# Altium PCB PCB.PcbDoc
Units mm, origin at the board's own origin, x right, y up, seen from the top; angles counter-clockwise.
Board outline 57 x 42 mm, 2 copper layers (Top Layer, Bottom Layer); 55 components, 41 nets, 176 pads, 4 vias.
Unrouted connection lines stored in the file: 6.
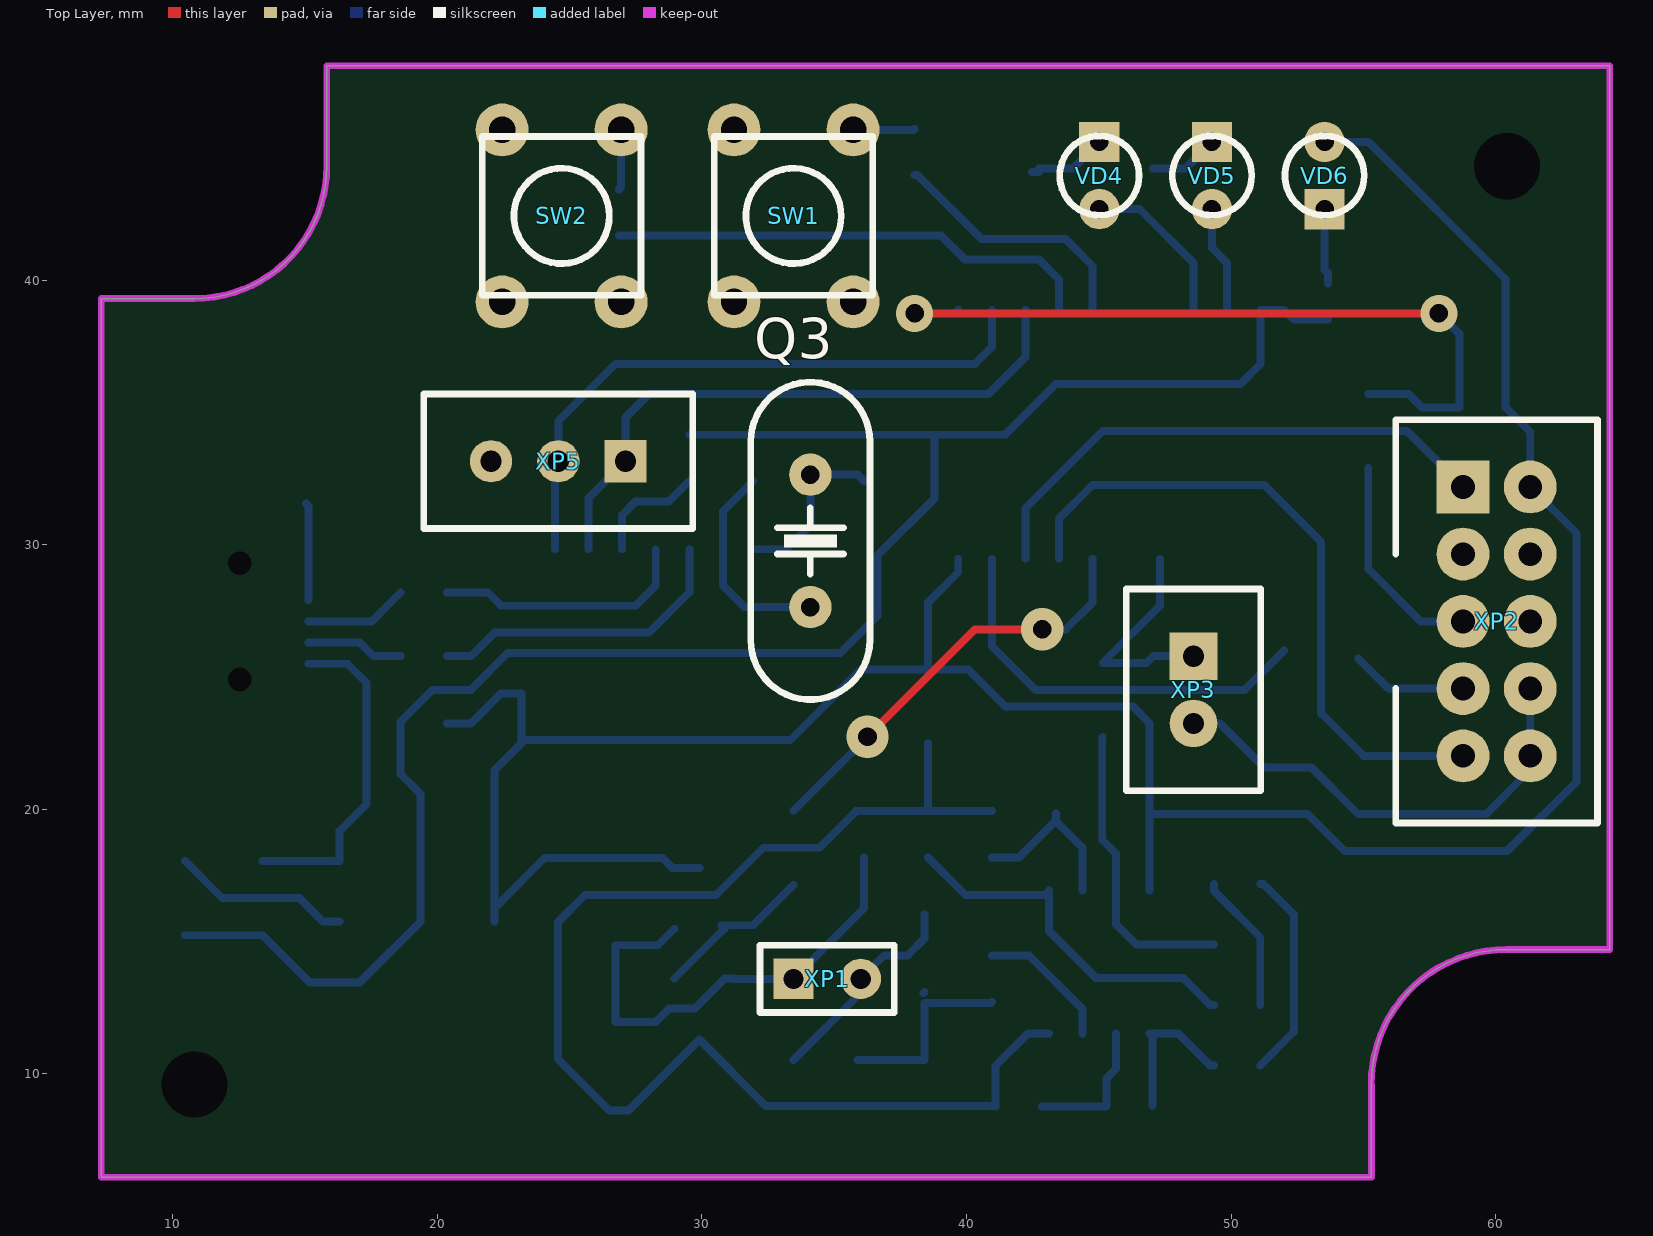
[diagram p0: Top Layer view]
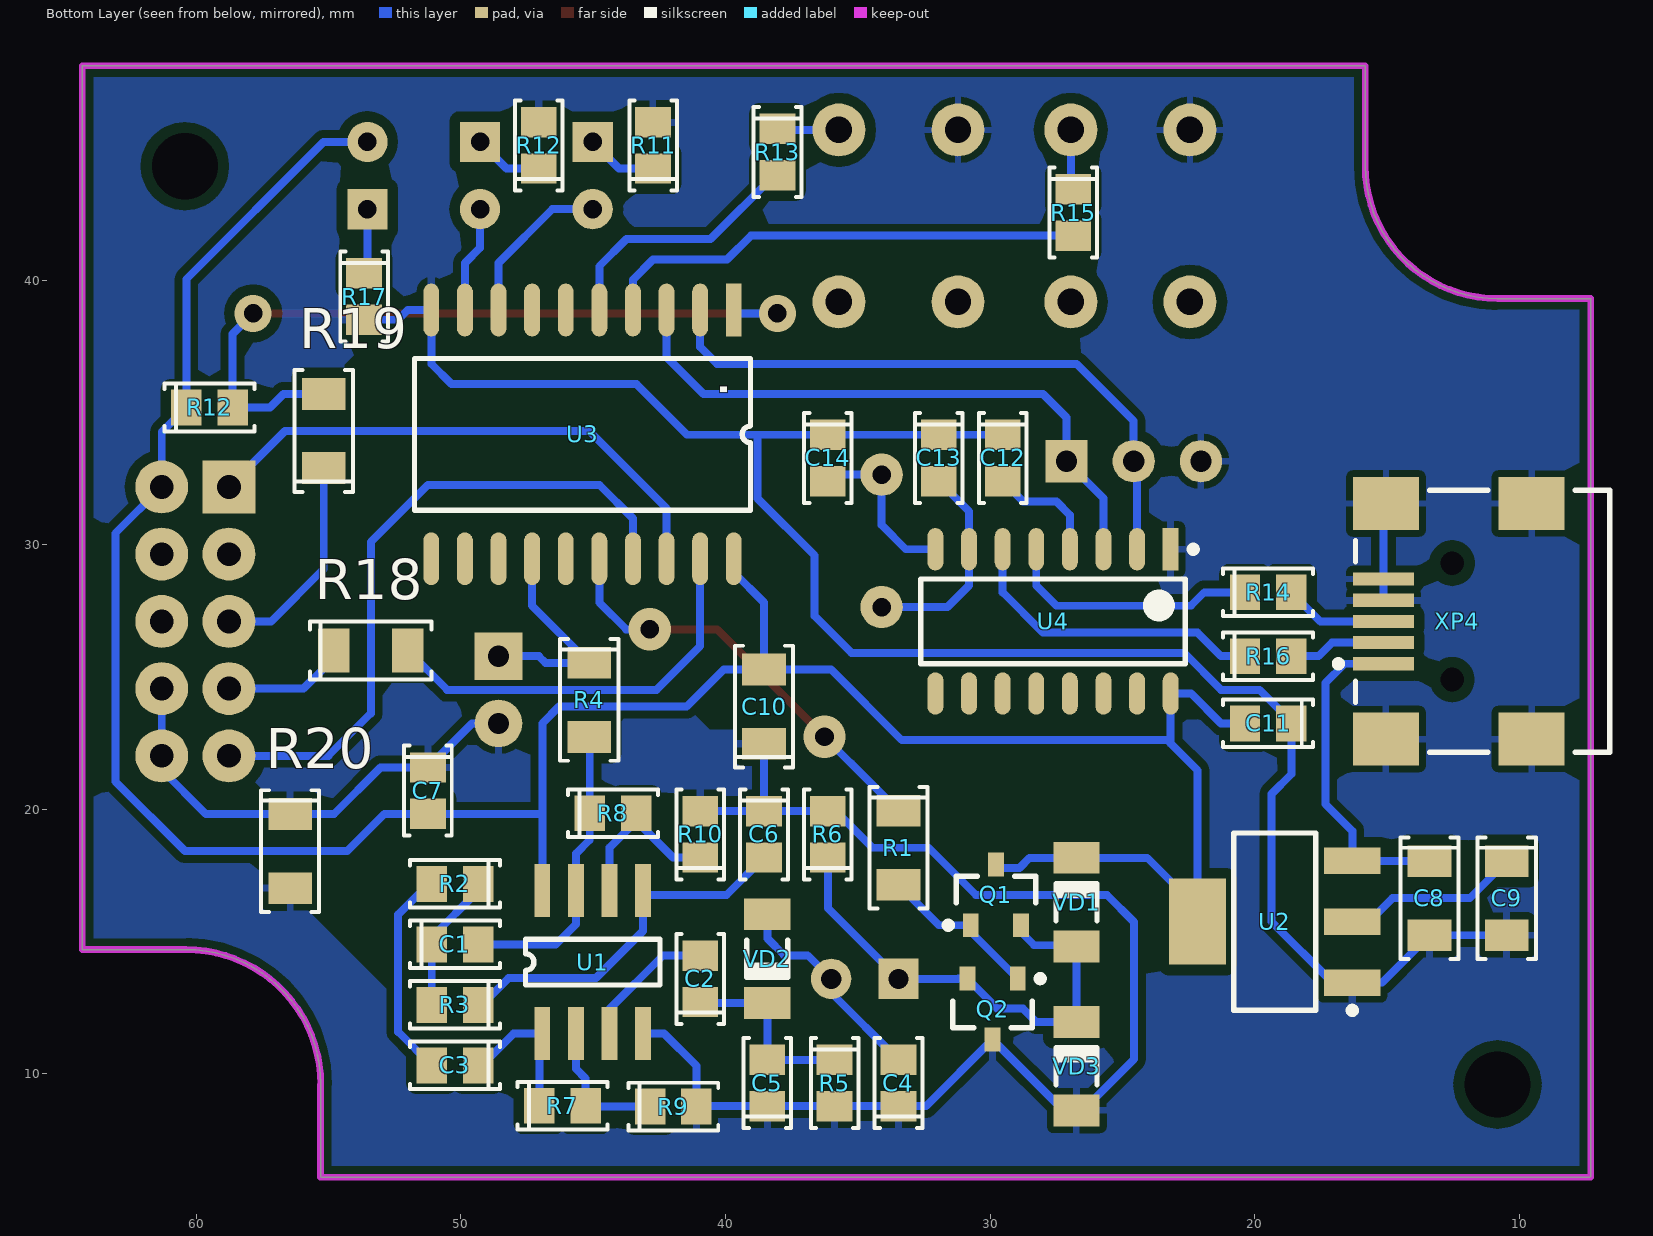
[diagram p1: Bottom Layer view, seen from below]

## Layer stack, top to bottom
Top Solder: solder mask 0.0102, Solder Resist, Dk 3.5
Top Layer: signal copper 0.0356
Dielectric 1: dielectric 0.32, FR-4, Dk 4.8
Bottom Layer: signal copper 0.0356
Bottom Solder: solder mask 0.0102, Solder Resist, Dk 3.5

## Board outline
7.3,6.125 7.3,39.3 10.825,39.3 ccw(c10.825,44.3) 15.825,44.3 15.825,48.1 64.3,48.1 64.3,14.7 60.387,14.7 ccw(c60.387,9.6) 55.287,9.6 55.3,9.6 55.3,6.1 7.325,6.1

## Design rules (kind name [scope] priority, off if disabled: settings)
Clearance [All] p1: gap=0.254 ignorepadtopadclearanceinfootprint=FALSE except(0: Arc-Hole Track-Hole SMDPad-Hole THPad-Hole Via-Hole Fill-Hole Poly-Hole Region-Hole Text-Hole; 0.2: Arc-THPad Track-THPad; 0.3: Arc-Fill Arc-Poly Arc-Region Track-Fill Track-Poly Track-Region; 0.4: SMDPad-Fill SMDPad-Poly SMDPad-Region THPad-Fill THPad-Poly THPad-Region Via-Fill Via-Poly Via-Region Fill-Fill Fill-Poly Fill-Region Poly-Poly Poly-Region Region-Region)
PolygonConnect [All] p1: connectstyle=Relief reliefconductorwidth=0.254 reliefentries=4 polygonreliefangle="90 Angle" airgapwidth=0.254
RoutingVias [All] p1: holewidth=0.7 width=1.4 viastyle="Through Hole" minholewidth=0.7 minwidth=1.2 maxholewidth=0.9 maxwidth=1.6
SolderMaskExpansion [All] p1: expansion=0.102
Width [All] p1: maxlimit=0.4 minlimit=0.3 preferedwidth=0.4 minimp=50.000000 maximp=50.000000 favimp=50.000000
30 further rules are at their usual default settings.

## Classes and differential pairs
component class MCU: C8 C9 C10 C11 C12 C13 C14 Q3 R11 R12 R13 R14 R15 R16 R17 R18 R19 R20 SW1 SW2 U2 U3 U4 VD4 VD5 VD6 XP2 XP3 XP4 XP5
component class Analog: C1 C2 C3 C4 C5 C6 C7 Q1 Q2 R1 R2 R3 R4 R5 R6 R7 R8 R9 R10 U1 VD1 VD2 VD3 XP1

## Components (designator, comment, footprint, x,y, rotation, side; value= is the part's Value field where it differs from the comment)
C1 "1n" SMD_0805 50.222,14.894 r180 bottom
C2 "390p" SMD_0805 40.955,13.593 r90 bottom
C3 "22n" SMD_0805 50.222,10.322 r0 bottom
C4 "3.3nF" SMD_0805 33.462,9.656 r90 bottom
C5 "33n" SMD_0805 38.415,9.656 r90 bottom
C6 "1n" SMD_0805 38.542,19.054 r270 bottom
C7 "100n" SMD_0805 51.242,20.705 r270 bottom
C8 "" SMD_1206 13.396,16.641 r270 bottom
C9 "" SMD_1206 10.475,16.641 r270 bottom
C10 "" SMD_1206 38.542,23.88 r90 bottom
C11 "" SMD_0805 19.492,23.245 r0 bottom
C12 "" SMD_0805 29.525,33.278 r270 bottom
C13 "" SMD_0805 31.938,33.278 r270 bottom
C14 "" SMD_0805 36.129,33.278 r270 bottom
Q1 "BC847" SOT23-3PIN 29.779,16.768 r90 bottom
Q2 "BC857" SOT23-3PIN 29.906,12.45 r270 bottom
Q3 "8MHz" QUARTZ 34.097,27.643 r90 top
R1 "10k" SMD_1206 33.462,18.546 r270 bottom
R2 "10k" SMD_0805 50.222,17.18 r0 bottom
R3 "10k" SMD_0805 50.222,12.608 r0 bottom
R4 "1k" SMD_1206 45.146,24.134 r270 bottom
R5 "10k" SMD_0805 35.875,9.656 r270 bottom
R6 "10k" SMD_0805 36.129,19.054 r90 bottom
R7 "47k" SMD_0805 46.158,8.798 r180 bottom
R8 "5.8k" SMD_0805 44.253,19.847 r180 bottom
R9 "23k" SMD_0805 41.971,8.767 r180 bottom
R10 "10k" SMD_0805 40.955,19.054 r90 bottom
R11 "" SMD_0805 42.733,45.089 r90 bottom
R12 "" SMD_0805 47.051,45.089 r90 bottom
R12 "" SMD_0805 59.497,35.183 r180 bottom
R13 "" SMD_0805 38.034,44.835 r270 bottom
R14 "" SMD_0805 19.492,28.198 r180 bottom
R15 "" SMD_0805 26.858,42.549 r270 bottom
R16 "" SMD_0805 19.492,25.785 r180 bottom
R17 "" SMD_0805 53.655,39.374 r270 bottom
R18 "0" SMD_1206 53.401,26 r180 bottom
R19 "0" SMD_1206 55.179,34.294 r90 bottom
R20 "0" SMD_1206 56.449,18.419 r270 bottom
SW1 "SW" SWITCH 33.462,42.422 r180 top
SW2 "SW" SWITCH 24.699,42.422 r180 top
U1 "LM358" SO8-150mil 46.92,11.526 r90 bottom
U2 "AMS1117" SOT-223 19.238,15.752 r0 bottom
U3 "ATtiny2313A-SU" SOP20-300mil 39.685,38.866 r270 bottom
U4 "CH340" SOIC-16 27.62,27.1 r270 bottom
VD1 "1N4148" DIO-MELF_SOD-80 26.731,16.49 r270 bottom
VD2 "1N4148" DIO-MELF_SOD-80 38.415,14.355 r90 bottom
VD3 "1N4148" DIO-MELF_SOD-80 26.731,10.291 r270 bottom
VD4 "" LED-3mm 45.019,43.946 r270 top
VD5 "" LED-3mm 49.274,43.946 r270 top
VD6 "" LED-3mm 53.528,43.946 r90 top
XP1 "IND_CON" PIN-HEAD-1/2/2.54 33.462,13.593 r90 top
XP2 "CON_10" BH10 61.3,27.1 r90 top
XP3 "CON2_0" HEAD-1/2/2.54 48.575,25.785 r0 top
XP4 "USB" USB/SM0.8-6H5 7.288,27.1 r180 bottom locked
XP5 "CON_3" HEAD-1/3/2.54 27.112,33.151 r270 top

## Footprints (in the part's own frame and the unit in brackets; to place one, negate y for a bottom-side part, rotate by r counter-clockwise, add the part's x,y. Pads: shape width x height; smd on the part's side, far side on the other; paste and mask are expansions set on the pad)
BH10 [mm]
  rect 2x2 hole 0.9: 1(5.08,2.54)
  round 2 hole 0.9: 2(5.08,0) 3(2.54,2.54) 4(2.54,0) 5(0,2.54) 6(0,0) 7(-2.54,2.54) 8(-2.54,0) 9(-5.08,2.54) 10(-5.08,0)
  silkscreen extent -7.62,-2.54 7.62,5.08
DIO-MELF_SOD-80 [mm]
  rect 1.2x1.75 smd: 1(-1.675,0) 2(1.675,0)
  silkscreen extent -0.7,-0.78 0.7,0.77, body extent -1.85,-0.8 1.85,0.8, height 1.59
HEAD-1/2/2.54 [mm]
  rect 1.8x1.8 hole 0.8: 1(0,0)
  round 1.8 hole 0.8: 2(0,-2.54)
  silkscreen extent -2.54,-5.08 2.54,2.54
HEAD-1/3/2.54 [mm]
  rect 1.6x1.6 hole 0.8: 1(0,0)
  round 1.6 hole 0.8: 2(0,-2.54) 3(0,-5.08)
  silkscreen extent -2.54,-7.62 2.54,2.54
LED-3mm [mil]
  rect 60x60 hole 27.56: 1(-50,0)
  round 60 hole 27.56: 2(50,0)
  silkscreen extent -59,-59 59,59
PIN-HEAD-1/2/2.54 [mil]
  rect 60x60 hole 30: 1(0,0)
  round 60 hole 30: 2(0,-100)
  silkscreen extent -50,-150 50,50
QUARTZ [mm]
  round 1.6 hole 0.7: 1(0,0) 2(5,0)
  silkscreen extent -3.5,-2.25 8.5,2.25
SMD_0805 [mm] "Chip smd, 2-Leads, Body 2.00x1.25mm, IPC Medium Density"
  rect 1.15x1.35 smd: 1(-0.875,0) 2(0.875,0)
  silkscreen extent -1.7,-0.9 1.7,0.9
SMD_1206 [mm] "Chip smd, 2-Leads, Body 3.13x1.55mm, IPC Medium Density"
  rect 1.2x1.65 smd: 1(-1.4,0) 2(1.4,0)
  silkscreen extent -2.3,-1.1 2.3,1.1
SO8-150mil [mm]
  rect 2x0.6 smd: 1(0,0) 2(0,-1.27) 3(0,-2.54) 4(0,-3.81) 5(5.4,-3.81) 6(5.4,-2.54) 7(5.4,-1.27) 8(5.4,0)
  silkscreen extent 1.84,-4.44 3.56,0.63
SOIC-16 [mm]
  rect 1.6x0.6 smd: 1(-2.725,4.445)
  oval 1.6x0.6 smd: 2(-2.725,3.175) 3(-2.725,1.905) 4(-2.725,0.635) 5(-2.725,-0.635) 6(-2.725,-1.905) 7(-2.725,-3.175) 8(-2.725,-4.445) 9(2.725,-4.445) 10(2.725,-3.175) 11(2.725,-1.905) 12(2.725,-0.635) 13(2.725,0.635) 14(2.725,1.905) 15(2.725,3.175) 16(2.725,4.445)
  silkscreen extent -2.85,-5 1.6,5.42, body extent -2,-5 2,5, height 1.75
SOP20-300mil [mm]
  rect 2x0.6 smd: 1(0,0)
  oval 2x0.6 smd: 2(0,-1.27) 3(0,-2.54) 4(0,-3.81) 5(0,-5.08) 6(0,-6.35) 7(0,-7.62) 8(0,-8.89) 9(0,-10.16) 10(0,-11.43) 11(9.4,-11.43) 12(9.4,-10.16) 13(9.4,-8.89) 14(9.4,-7.62) 15(9.4,-6.35) 16(9.4,-5.08) 17(9.4,-3.81) 18(9.4,-2.54) 19(9.4,-1.27) 20(9.4,0)
  silkscreen extent 1.84,-12.07 7.56,0.63
SOT23-3PIN [mm]
  rect 0.9x0.6 smd: 1(-1.15,0.95) 2(-1.15,-0.95) 3(1.15,0)
  silkscreen extent -1.27,-1.5 0.7,1.93, body extent -0.7,-1.5 0.7,1.5, height 1.1
SOT-223 [mm]
  rect 2.15x1 smd: 1(-2.925,2.3) 2(-2.925,0) 3(-2.925,-2.3)
  rect 2.15x3.25 smd: 4(2.925,0)
  silkscreen extent -3.05,-3.35 1.55,3.47, body extent -1.85,-3.35 1.85,3.35, height 1.8
SWITCH [mm]
  round 2 hole 1: 1(-2.25,-3.25) 2(2.25,-3.25) 3(-2.25,3.25) 4(2.25,3.25)
  silkscreen extent -3,-3 3,3
USB/SM0.8-6H5 [mm] "Connector; USB2.0, Type B, SM; 5 Position; Right Angle"
  rect 2.3x0.5 smd: 1(-7.85,-1.6) 2(-7.85,-0.8) 3(-7.85,0) 4(-7.85,0.8) 5(-7.85,1.6)
  rect 2.5x2 smd: 6(-7.75,4.45) 7(-2.25,4.45) 8(-7.75,-4.45) 9(-2.25,-4.45)
  round 0.6 hole 0.9 unplated: MH1(-5.25,2.2) MH2(-5.25,-2.2)
  silkscreen extent -9.68,-4.95 0.7,4.95, body extent -8.9,-4.95 0.7,4.95, height 3.9

## Part data
C1 C2 C3 C4 C5 C6 C7: library part C_NONE_POLAR, "None polar capacitor", Case=0805
C8 C9 C10 C11 C12 C13 C14: library part C_NONE_POLAR, "None polar capacitor"
Q1: "NPN", Case=SOT-23, Manufacture=NXP, HelpURL=https://assets.nexperia.com/documents/data-sheet/BC847_SER.pdf, Model=BC847
Q2: "PNP", Case=SOT-23, Manufacture=NXP, HelpURL=https://assets.nexperia.com/documents/data-sheet/BC856_BC857_BC858.pdf, Model=BC857
Q3: library part CRYSTAL, "Crystal oscillator"
R1 R2 R3 R4 R5 R6 R7 R8 R9 R10: library part RES, "Resistor", Case=0805
R11 R12 R12 R13 R14 R15 R16 R17 R18 R19 R20: library part RES, "Resistor"
SW1 SW2: "Switch"
U1: "OpAmp", Case=SOIC-8, Manufacture=TI, HelpURL=http://www.ti.com/lit/ds/symlink/lm158-n.pdf, Model=LM358
U2: "Linear voltage regulator"
U3: "8-bit AVR Microcontroller, 1.8-5.5V, 2KB Flash, 128 Bytes EEPROM, 128 Bytes SRAM, 20-pin SOIC, Industrial Grade (-40°C to 85°C), Pb-Free", Supplier Part Number 1=ATTINY2313A-SU-ND, Code_IPC=SOIC127P1030-20, Code_JEDEC=MS-013-AC, ComponentLink1Description="Manufacturer Link", ComponentLink1URL=http://www.atmel.com/products/avr/default.asp?, ComponentLink2Description="ATtiny2313A/4313 Datasheet", ComponentLink2URL=http://www.atmel.com/dyn/resources/prod_documents/doc8246.pdf, ComponentLink3Description="ATtiny2313A/4313 Summary", ComponentLink3URL=http://www.atmel.com/dyn/resources/prod_documents/8246S.pdf, ComponentLink4Description="Atmel.com Home", ComponentLink4URL=http://www.atmel.com, DatasheetVersion="revA, Dec-2009", PackageDescription="20-lead, 0.300\" Wide Body, Plastic Gull Wing Small Outline Package (SOIC)", PackageReference=20S, PackageVersion="revA, Jan-2002", Published=1-Apr-2010, Publisher="Altium Limited", Supplier 1=Digi-Key, Supplier 2=Mouser, Supplier Part Number 2=556-ATTINY2313A-SU
VD1 VD3: library part DIODE, "Diode"
VD2: library part DIODE, "Diode", Case=0805
VD4 VD5 VD6: library part LED, "LED"
XP1: library part CON_2

## Free pads (board coordinates)
  round 2.4 hole 2.5 unplated: 5(10.825,9.6) 5(60.425,44.3)

## Via types
v1: diameter 1.4, hole 0.7, Top Layer to Bottom Layer, 2 vias
v2: diameter 1.6, hole 0.7, Top Layer to Bottom Layer, 2 vias

## Nets (pads, with @x,y where several pads share a name; then routed paths per layer and width w, separated by ;. In a path a pad name is that pad's centre, name@x,y a point inside that pad or via, vN(x,y) a via of type N, cw(c..) or ccw(c..) an arc to the next point about the centre after c; other vN are vias at no path point)
1: SW1.3 SW2.3
2: SW1.4 SW2.4
+5V: C7.2 C9.1 C10.2 C11.2 Q1.3 R12.1@60.372,35.183 U1.8 U2.2 U2.4 U3.20 U4.16 VD1.1 VD6.2 XP2.2 | length 111.2
  Bottom Layer w0.3: C9.1 11.875,16.641 14.793,16.641 15.682,15.752 U2.2 ; C11.2 21.27,23.245 22.4,24.375 U4.16 23.175,22.483 22.163,21.471 U2.4@22.163,16.264 ; U2.4 U2.4@22.163,16.264 ; 23.302,22.61 33.335,22.61 36.005,25.28 C10.2 ; Q1.3@29.906,17.784 28.89,17.784 28.509,18.165 VD1.1 24.064,18.165 U2.4@22.163,16.264 ; U3.20 39.685,28.96 38.542,27.817 C10.2 ; U1.8 46.92,19.816 ; VD6.2 55.184,45.216 60.372,40.028 60.372,35.183 61.3,34.255 XP2.2 63.053,30.427 63.053,21.053 60.419,18.419 54.29,18.419 52.879,19.83 C7.2 46.934,19.83 46.92,19.816 ; C10.2 40.063,25.28 41.463,23.88 46.285,23.88 46.92,23.245 46.92,19.816
GND: C4.1 C5.1 C6.1 C7.1 C8.2 C9.2 C10.1 C11.1 C12.1 C13.1 C14.1 Q2.3 R5.2 R6.2 R9.2 R10.2 R11.2 R12.2@47.051,45.964 R17.2 R20.1 R20.2 SW1.2 SW2.2 U1.4 U2.1 U3.10 U4.1 VD3.2 XP2.8 XP2.10 XP3.2 XP4.4 XP4.5 XP4.6 XP4.7 XP4.8 XP4.9 XP5.3 | length 144.3
  Bottom Layer w0.3: C9.2 C8.2 15.185,13.452 U2.1 17.065,13.452 19.365,15.752 19.365,20.578 18.617,21.326 18.617,23.316 19.816,24.515 21.27,24.515 22.667,25.912 35.24,25.912 36.637,27.309 36.637,29.595 38.789,31.747 38.789,34.153 ; XP4.6 15.138,31.45 XP4.5 XP4.4 ; C12.1 C13.1 C14.1 38.789,34.153 ; C10.1 C6.1 ; R10.2 C6.1 ; U1.4 42.317,11.526 41.096,10.305 R9.2 41.082,8.781 C5.1 R5.2 C4.1 32.425,8.781 Q2.3 27.222,8.616 VD3.2 26.501,8.616 24.558,10.559 24.558,15.738 25.588,16.768 30.541,16.768 32.319,18.546 34.438,18.546 35.821,19.929 R6.2 C6.1 ; XP3.2 49.577,23.245 C7.1 53.034,21.58 54.798,19.816 59.624,19.816 61.3,21.492 XP2.10 XP2.8 ; R17.2 52.371,38.499 52.004,38.866 U3.10 51.115,36.834 50.353,36.072 43.368,36.072 41.449,34.153 38.789,34.153
LED: U3.8 VD4.2 | length 6.2
  Bottom Layer w0.3: VD4.2 46.543,42.676 48.575,40.644 U3.8
LED2: U3.9 VD5.2 | length 4
  Bottom Layer w0.3: VD5.2 49.274,41.216 49.845,40.644 U3.9
MISO: U3.17 XP2.9 | length 25.4
  Bottom Layer w0.3: U3.17 43.495,30.992 44.765,32.262 51.242,32.262 53.401,30.103 53.401,23.626 55.007,22.02 XP2.9
MOSI: U3.18 XP2.1 | length 20.5
  Bottom Layer w0.3: U3.18 42.225,31.373 45.146,34.294 56.646,34.294 XP2.1
NetC1_1: C1.1 R2.1 R3.2 | length 5.3
  Bottom Layer w0.3: R2.1 49.347,16.912 51.097,15.162 C1.1 R3.2
NetC1_2: C1.2 R4.2 R8.1 U1.7 | length 11.3
  Bottom Layer w0.3: R4.2 45.128,22.716 R8.1 45.128,18.845 45.65,18.323 U1.7 45.65,15.656 46.412,14.894 C1.2
NetC2_1: C2.1 C5.2 R5.1 VD2.1 | length 7.3
  Bottom Layer w0.3: R5.1 C5.2 VD2.1 40.917,12.68 C2.1 ; VD2.1@38.377,13.061 VD2.1@38.415,13.099
NetC2_2: C2.2 U1.3 | length 5.2
  Bottom Layer w0.3: C2.2 42.366,14.468 44.38,12.454 U1.3
NetC3_1: C3.1 R7.1 U1.1 | length 5.7
  Bottom Layer w0.3: R7.1 47.033,11.413 U1.1 48.002,11.526 49.206,10.322 C3.1
NetC3_2: C3.2 R2.2 | length 8
  Bottom Layer w0.3: C3.2 52.367,11.592 52.367,16.023 51.21,17.18 R2.2
NetC4_2: C4.2 VD2.2 XP1.2 | length 8.1
  Bottom Layer w0.3: C4.2 36.002,13.071 XP1.2 36.891,14.482 37.78,14.482 38.415,15.117 VD2.2
NetC6_2: C6.2 R3.1 U1.5 | length 14.1
  Bottom Layer w0.3: C6.2 39.953,16.768 42.952,16.768 U1.5 43.11,15.402 44.888,13.624 48.19,13.624 49.206,12.608 R3.1
NetC12_2: C12.2 U4.4 | length 4.4
  Bottom Layer w0.3: U4.4 26.985,31.119 27.493,31.627 28.749,31.627 C12.2
NetC13_2: C13.2 Q3.1 U4.7 | length 8.1
  Bottom Layer w0.3: C13.2 30.795,31.26 U4.7 30.795,28.452 31.604,27.643 Q3.1
NetC14_2: C14.2 Q3.2 U4.8 | length 6.4
  Bottom Layer w0.3: U4.8 33.184,29.825 34.097,30.738 Q3.2 35.889,32.643 C14.2
NetQ1_1: Q1.1 Q2.1 R1.2 | length 6
  Bottom Layer w0.3: Q2.1 30.84,15.484 Q1.1@30.856,15.484 ; Q1.1 31.934,15.618 R1.2
NetQ1_2: Q1.2 Q2.2 R6.1 VD1.2 VD3.1 XP1.1 | length 18.4
  Bottom Layer w0.3: VD1.2 VD3.1 28.255,11.966 28.763,12.474 29.73,12.474 Q2.2 31.203,13.6 31.21,13.593 XP1.1 36.129,16.26 R6.1 ; VD1.2@26.731,14.863 28.335,14.863 Q1.2@28.956,15.484
NetR7_2: R7.2 R9.1 U1.2 | length 5.3
  Bottom Layer w0.3: R9.1 45.252,8.767 R7.2 45.283,9.828 45.65,10.195 U1.2
NetR8_2: R8.2 R10.1 U1.6 | length 6.6
  Bottom Layer w0.3: R10.1 41.985,18.179 43.378,19.572 R8.2 43.378,19.552 44.38,18.55 U1.6
NetR11_1: R11.1 VD4.1 | length 3
  Bottom Layer w0.3: R11.1@42.479,44.087 R11.1@42.733,44.087 ; R11.1 44.017,44.214 VD4.1
NetR12_1: R12.1@47.051,44.214 VD5.1 | length 2.6
  Bottom Layer w0.3: R12.1@47.051,44.214 48.272,44.214 VD5.1
NetR13_1: R13.1 SW1.1 | length 2.3
  Bottom Layer w0.3: SW1.1 37.996,45.672 R13.1
NetR13_2: R13.2 U3.5 | length 9.8
  Bottom Layer w0.3: R13.2 38.147,43.96 40.56,41.547 43.735,41.547 44.765,40.517 U3.5
NetR14_1: R14.1 U4.5 | length 9.8
  Bottom Layer w0.3: R14.1 21.905,28.198 22.413,27.69 27.493,27.69 28.255,28.452 U4.5
NetR14_2: R14.2 XP4.3 | length 3.9
  Bottom Layer w0.3: XP4.3 17.519,27.1 R14.2
NetR15_1: R15.1 SW2.1 | length 2.3
  Bottom Layer w0.3: R15.1 26.949,43.515 SW2.1
NetR15_2: R15.2 U3.4 | length 18.5
  Bottom Layer w0.3: R15.2 39.036,41.674 39.939,40.771 42.733,40.771 43.495,40.009 U3.4
NetR16_1: R16.1 U4.6 | length 11.8
  Bottom Layer w0.3: R16.1 21.27,25.785 22.159,26.674 28.001,26.674 29.525,28.198 U4.6
NetR16_2: R16.2 XP4.2 | length 3.7
  Bottom Layer w0.3: XP4.2 17.072,26.3 17.587,25.785 R16.2
NetR17_1: R17.1 VD6.1 | length 2.9
  Bottom Layer w0.3: VD6.1 53.528,40.39 53.655,40.263 R17.1 R17.1@53.655,39.868
OUT: R4.1 U3.14 XP3.1 | length 8.4
  Bottom Layer w0.3: U3.14 47.305,27.693 R4.1 46.8,25.534 47.051,25.785 XP3.1
PWM: R1.1 U3.16 | length 16.2
  Top Layer w0.3: v2(36.256,22.737) 40.32,26.801 v2(42.86,26.801)
  Bottom Layer w0.3: R1.1 35.24,21.724 35.243,21.724 v2(36.256,22.737) ; v2(42.86,26.801) 43.749,26.801 44.765,27.817 U3.16
RST: R12.2@58.622,35.183 R19.1 R19.2 U3.1 XP2.5 | length 37.3
  Top Layer w0.3: v1(38.034,38.739) v1(57.846,38.739)
  Bottom Layer w0.3: v1(38.034,38.739) 39.558,38.739 U3.1 ; R19.1 55.179,29.087 57.166,27.1 XP2.5 ; R19.2 56.7,35.694 57.211,35.183 58.622,35.183 58.622,37.963 v1(57.846,38.739)
RX: U3.2 U4.2 XP5.2 | length 23.8
  Bottom Layer w0.3: U4.2 24.445,33.024 XP5.2 24.572,34.675 26.731,36.834 40.32,36.834 40.955,37.469 U3.2
SCK: R18.1 R18.2 U3.19 XP2.7 | length 20.1
  Bottom Layer w0.3: U3.19 40.955,26.166 42.606,24.515 50.516,24.515 R18.2 ; R18.1@54.8,25.7 55.223,25.277 55.94,24.56 XP2.7
TX: U3.3 U4.3 XP5.1 | length 23.4
  Bottom Layer w0.3: U4.3 25.715,31.754 XP5.1 27.112,34.802 28.001,35.691 40.828,35.691 42.225,37.088 U3.3
VCC: C8.1 U2.3 XP4.1 | length 12.6
  Bottom Layer w0.3: C8.1 16.302,18.041 U2.3 16.313,19.177 17.333,20.197 17.333,24.769 16.602,25.5 XP4.1
pads on no net: U3.6 U3.7 U3.11 U3.12 U3.13 U3.15 U4.9 U4.10 U4.11 U4.12 U4.13 U4.14 U4.15 XP2.3 XP2.4 XP2.6 XP4.MH1 XP4.MH2

## Polygon pours and split planes (outlines as drawn)
GND on Bottom Layer "Bottom Layer-No Net" (solid, remove dead copper, pour order 0): 7.3,7 7.3,39.373 12.7,39.373 12.86,39.44 12.861,39.44 15.76,42.339 15.76,42.34 15.827,42.5 15.827,48.1 64.3,48.1 64.3,6.1 7.3,6.1

## Keep-outs
Keep-Out Layer:
  lines w0.25: 7.3,6.1 55.3,6.1 55.3,6.985 55.3,8.728 55.3,9.6 ; 7.325,6.1 7.3,6.125 7.3,39.3 10.825,39.3 ; 15.825,44.3 15.825,48.1 64.3,48.1 64.3,14.7 60.387,14.7
  lines w0.254: 10.825,39.3 ccw(c10.825,44.3) 15.825,44.3 ; 55.287,9.6 cw(c60.387,9.6) 60.387,14.7

## Other copper
Bottom Layer:
  pour cut-out: 47.1,19.5 47.3,19.3 55.8,19.3 55.8,16.2 52.6,13 47.1,13 47.1,19.4 47,19.5
  pour cut-out: 51.5,38.2 53,38.2 54.4,36.8 54.4,34.6 52.2,34.6 40.6,23 35.7,23 35.7,30.2 42.2,36.7 49.9,36.7 51.4,38.2
  pour cut-out: 64.3,6.1 55.4,6.1 55.4,11.2 58.8,14.6 64.3,14.6
  pour cut-out: 7.3,48.1 7.3,39.723 13.223,39.723 15.6,42.1 15.6,48.3 15.4,48.1

## Text inside footprints (layer, text, board x,y; h text height)
XP4: Mechanical 1 "PCB Edge" at 6.856,23.064 h0.25 r270